# Altium PCB Smart_lockV1.1.PcbDoc (part 2 of 2)
Units mil, origin at the board's own origin, x right, y up, seen from the top; angles counter-clockwise.
Board outline 1820 x 1755 mil, 4 copper layers (Top Layer, Layer 1, Layer 2, Bottom Layer), stack 62.449 mil thick; 74 components, 60 nets, 291 pads, 502 vias.
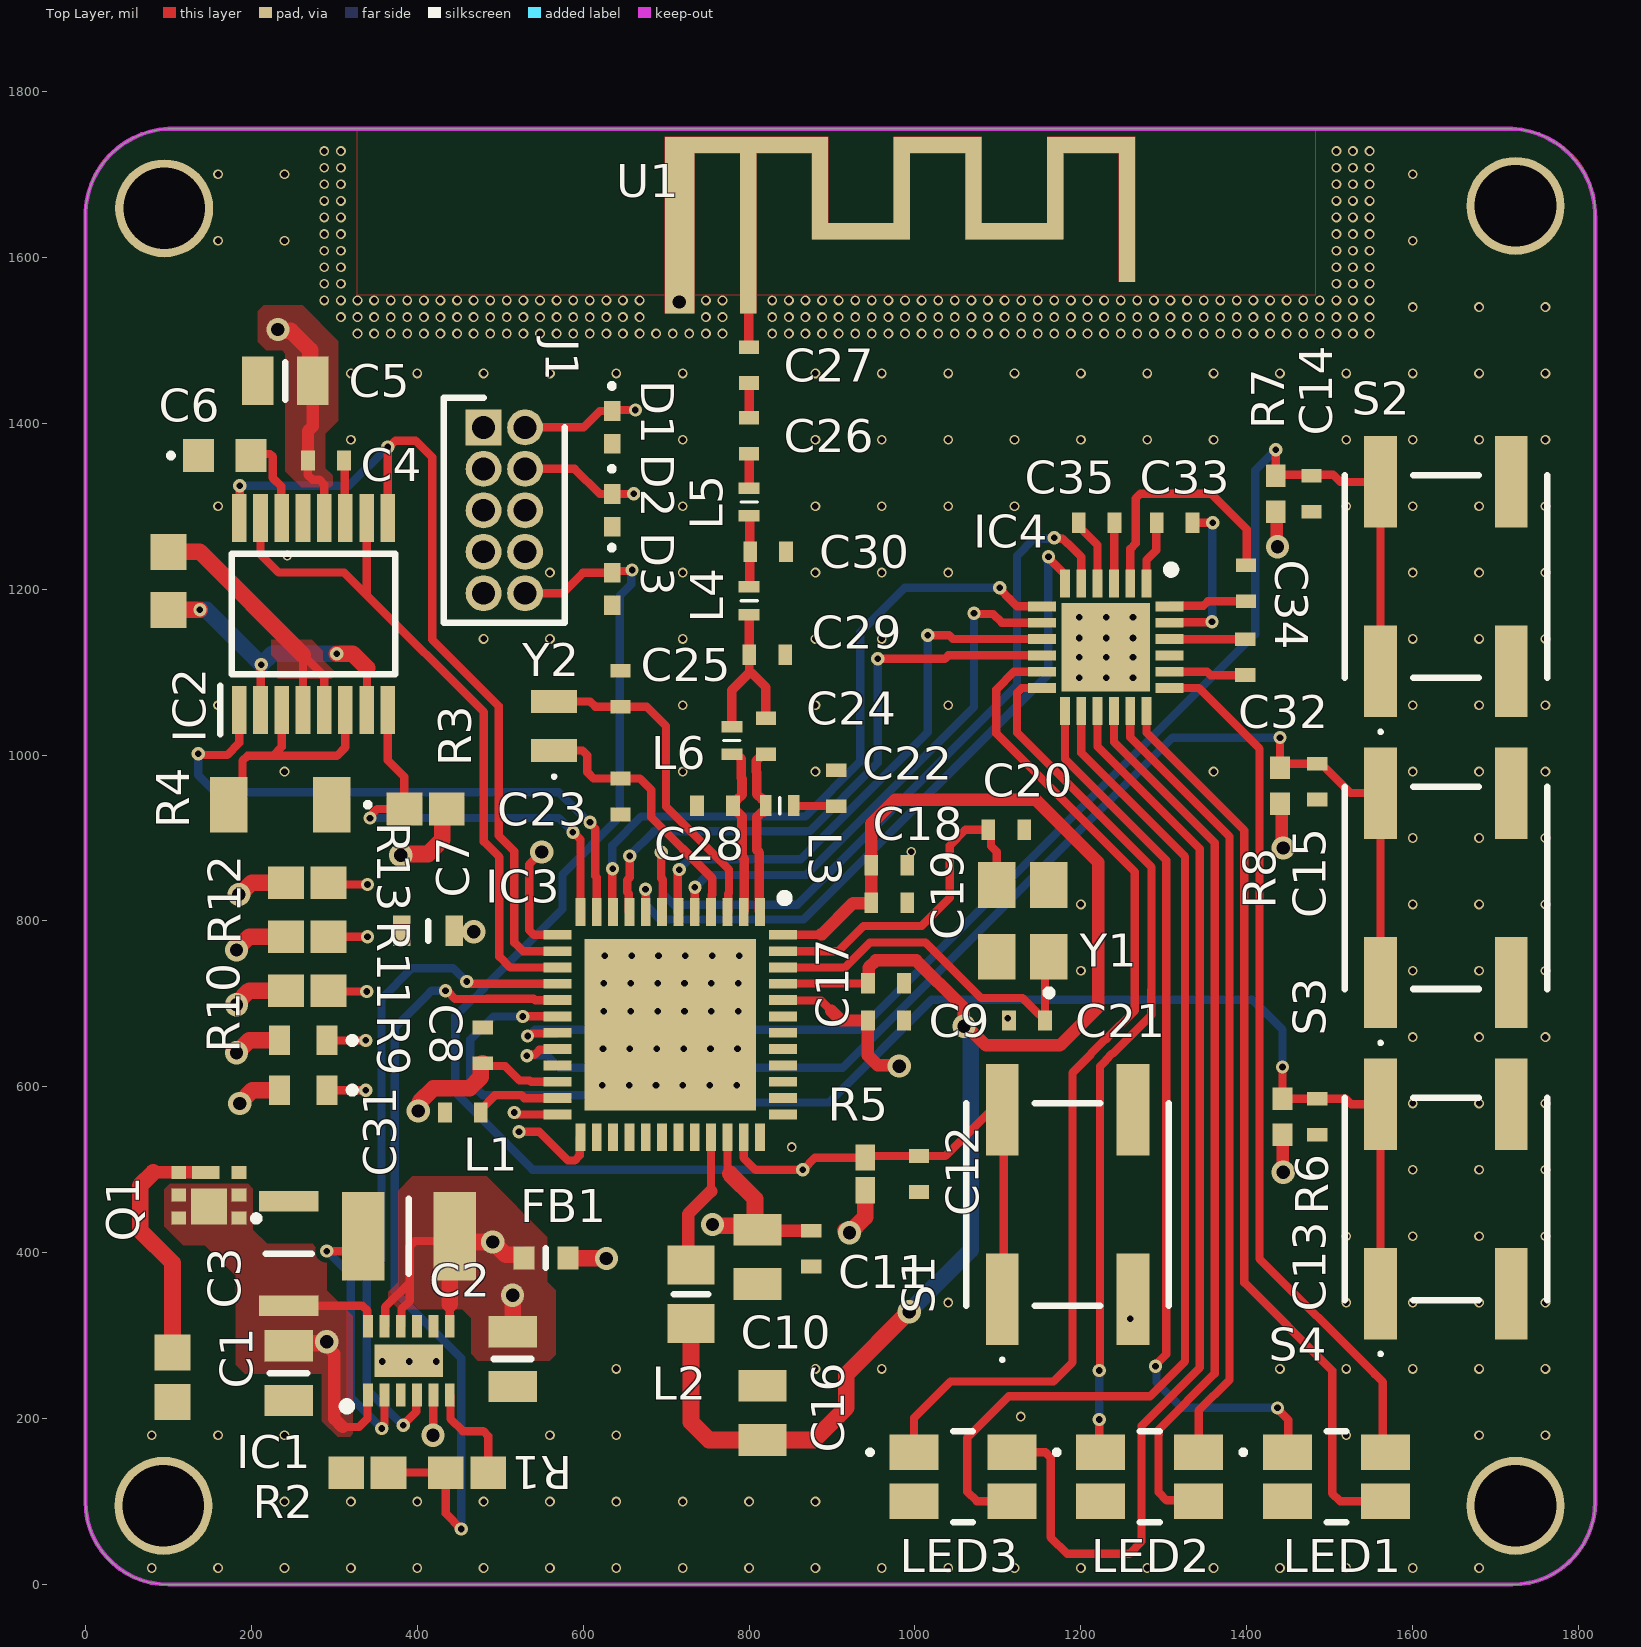
[diagram p0: Top Layer view]

## Via types
v1: diameter 11.81, hole 7.87, Top Layer to Bottom Layer, 383 vias
v2: diameter 16, hole 8, Top Layer to Bottom Layer, tented both sides, 95 vias
v3: diameter 28, hole 16, Top Layer to Bottom Layer, tented both sides, 24 vias

## Nets (pads, with @x,y where several pads share a name; then routed paths per layer and width w, separated by ;. In a path a pad name is that pad's centre, name@x,y a point inside that pad or via, vN(x,y) a via of type N, cw(c..) or ccw(c..) an arc to the next point about the centre after c; other vN are vias at no path point) (continued)
IN1: (continued)
  Top Layer w10: IC2.16 186,1286.24 v2@186,1323 ; IC2.9 364.57,1369.71 373.86,1379 398,1379 418,1359 418,1139.28 498.13,1059.15 498.13,902.96 517.13,883.96 517.13,773.87 527.42,763.58 IC3.14
  Bottom Layer w10: v2(186,1324.62) 317.86,1324.62 v2(364.57,1371.33)
IN2: IC2.10 IC2.15 IC3.15 | length 862.5
  Top Layer w10: IC2.15 211.02,1241.98 233,1220 312,1220 338.98,1193.02 ; IC2.10 338.98,1193.02 ; IC3.15 512.1,743.9 499,757 499,876.81 480.25,895.56 480.25,1051.75 338.98,1193.02
INT: IC3.10 IC4.7 R13.1 | length 1191.9
  Top Layer w10: R13.1 295.18,844 v2(340,844) ; v2(635.48,862.82) 635.2,862.54 635.2,811.73 IC3.10 ; v2(1102.24,1201.76) 1102.24,1200.14 1114.13,1188.25 1114.13,1188.19 1123.11,1179.21 IC4.7
  Layer 2 w10: v2(340,844) 465.14,844 479.14,830 602.66,830 v2(635.48,862.82)
  Bottom Layer w10: v2(635.48,862.82) 635.18,863.12 635.18,891.18 669.88,925.88 867.88,925.88 934,992 934,1148 987.76,1201.76 v2(1102.24,1201.76)
JTAG_TCK: D2.1 IC3.25 J1.4 | length 1550.2
  Top Layer w10: v2(522.67,545.85) 547.15,545.85 581.68,511.32 589.97,511.32 595.83,517.17 595.83,538.27 IC3.25 ; J1.4 589.84,1345 620.16,1314.68 D2.1 660.68,1314.68 v2(661,1315)
  Layer 2 w10: v2(522.67,545.85) 521.53,544.7 500.2,544.7 494.67,539.17 478.83,539.17 472,546 472,570 492,590 546,590 577,559 814,559 852,597 852,773 680,945 680,1296 v2(661,1315)
JTAG_TMS: D1.1 IC3.24 J1.2 | length 1491.6
  Top Layer w10: v2(516.9,569.01) 518.53,569.01 520.81,566.73 IC3.24 ; J1.2 600.47,1395 620.16,1414.68 D1.1 636.32,1416 v2(663,1416)
  Layer 2 w10: v2(516.9,569.01) 541.71,569.01 569.6,541.13 821.4,541.13 869.87,589.6 869.87,780.4 697.87,952.4 697.87,1381.13 v2(663,1416)
LP_D1: IC4.19 LED1.2 | length 1049.8
  Top Layer w10: IC4.19 1342.21,1080.79 1415.32,1007.69 1415.32,916.07 1415.37,916.02 1415.37,392.63 1554.28,253.72 1564.06,243.94 1564.06,162.53 LED1.2
LP_D2: IC4.18 LED1.3 | length 1103.9
  Top Layer w10: IC4.18 1279.21,1026.9 1397,909.11 1397,364 1503,258 1503,110 1512.53,100.47 LED1.3
LP_D3: IC4.17 LED2.2 | length 958.6
  Top Layer w10: IC4.17 1259.53,1021.31 1379.13,901.71 1379.13,246.72 1342.06,209.65 LED2.2
LP_D4: IC4.16 LED2.3 | length 1073.1
  Top Layer w10: IC4.16 1239.84,1015.71 1361.25,894.3 1361.25,254.25 1294,187 1294,181 1293.65,180.65 1293.65,111.35 1303.39,101.61 1340.91,101.61 LED2.3
LP_D5: IC4.15 LED3.2 | length 1350.8
  Top Layer w10: LED3.2 1157.47,159.53 1163.67,153.33 1163.67,57.05 1183.6,37.13 1258.4,37.13 1273.13,51.85 1273.13,191.4 1343.38,261.66 1343.38,886.9 1220.16,1010.12 IC4.15
LP_D6: IC4.14 LED3.3 | length 1260.4
  Top Layer w10: LED3.3 1074.53,100.47 1063,112 1063,177 1113,227 1283.44,227 1325.5,269.06 1325.5,877.44 1200.47,1002.47 IC4.14
LP_D7: IC4.13 LED1.1 | length 1084
  Top Layer w10: IC4.13 1180.79,995.21 1303,873 1303,277.7 1289.96,264.66 v2(1289.96,263.04) ; v2(1437,213) 1437,211.38 1450,198.38 1450,160.58 LED1.1
  Bottom Layer w10: v2(1289.96,263.04) 1291.11,261.89 1291.11,243.65 1321.76,213 v2(1437,213)
LP_D8: IC4.12 LED2.1 | length 1042.6
  Top Layer w10: IC4.12 1128.86,1080.79 1123,1074.93 1123,1027 1285.13,864.87 1285.13,717.13 1285,717 1285,686.72 1238.44,640.17 1237.72,640.17 1230.18,632.62 1230.18,631.9 1223,624.72 1223,259 v2(1222,258) ; v2(1222,199) 1222,161.47 LED2.1
  Bottom Layer w10: v2(1222,199) v2(1222,258)
LP_D9: IC4.11 LED3.1 | length 1236
  Top Layer w10: LED3.1 998.94,200.94 1042.87,244.87 1166.87,244.87 1190,268 1190,617 1212.31,639.31 1212.31,640.03 1230.32,658.04 1231.04,658.04 1265,692 1265,859 1098,1026 1098,1079 1119.47,1100.47 IC4.11
NetC4_1: C4.1 IC2.11 | length 70
  Top Layer w10: C4.1 312.52,1354.13 312.52,1286.54 IC2.11
NetC6_2: C6.2 IC2.14 | length 107
  Top Layer w10: C6.2 201.5,1363 222.5,1363 225.83,1359.67 225.83,1334.17 236.15,1323.85 236.15,1286.13 IC2.14
NetC20_2: C20.2 IC3.47 Y1.3 | length 416
  Top Layer w10: IC3.47 907.58,763.58 938,794 1008,794 1042,828 1042,891 1061,910 C20.2 1091.61,906.73 1091.61,890.39 1098.5,883.5 Y1.3
NetC21_2: C21.2 IC3.46 Y1.1 | length 444.3
  Top Layer w10: IC3.46 915.41,743.9 945.51,774 1012.79,774 1079.79,707 1129.65,707 1149.45,687.2 1153.39,687.2 C21.2@1156.65,683.94 ; C21.2 C21.2@1156.65,683.94 ; Y1.1 1156.65,751.85 C21.2@1156.65,683.94
NetC22_1: C22.1 L3.2 | length 51.5
  Top Layer w10: L3.2 854.06,938.67 904.67,938.67 C22.1
NetC23_2: C23.2 IC3.4 Y2.1 | length 326.8
  Top Layer w10: Y2.1 599.14,1005.47 605,999.61 605,979.25 612.6,971.65 C23.2 668.35,971.65 682.13,957.87 682.13,924.97 755.63,851.46 755.63,831.89 755.12,831.38 755.12,811.73 IC3.4
NetC24_2: C24.2 C29.2 L4.1 L6.1 | length 208.6
  Top Layer w10: L4.1 L4.1@800.17,1169.09 ; C29.2@800.17,1121.17 C29.2 800.35,1099.35 802.65,1099.35
  Top Layer w11.55: L6.1 779.28,1078.28 800.35,1099.35 ; C29.2@800.17,1121.17 L4.1@800.17,1169.09 ; 802.65,1099.35 820.28,1081.72 C24.2
NetC25_2: C25.2 IC3.3 Y2.2 | length 403.5
  Top Layer w10: Y2.2 608.47,1064.53 614.65,1058.35 C25.2 676.65,1058.35 700,1035 700,937.67 775.71,861.96 775.71,833.8 774.8,832.89 774.8,828.71 774.8,811.73 IC3.3
NetC26_1: C26.1 L5.2 | length 41.6
  Top Layer w11.55: L5.2 C26.1
NetC26_2: C26.2 C27.1 | length 41.7
  Top Layer w11.55: C26.2 C27.1
NetC27_2: C27.2 U1.1 | length 137.8
  Top Layer w11.55: U1.1@799,1629 799.5,1628.5 799.5,1492.15 C27.2
NetC30_2: C30.2 L4.2 L5.1 | length 86.7
  Top Layer w10: L4.2 L4.2@800.67,1203.41 ; L5.1 L5.1@800.67,1287.59 ; C30.2@800.67,1244.33 C30.2 C30.2@800.67,1245.67
  Top Layer w11.55: L4.2@800.67,1203.41 C30.2@800.67,1244.33 ; C30.2@800.67,1245.67 L5.1@800.67,1287.59
NetC31_2: C31.2 IC3.23 | length 104.9
  Top Layer w10: C31.2 476.65,572.94 493.6,589.89 525.55,589.89 529.02,586.42 IC3.23
NetC32_1: C32.1 IC4.22 | length 91.3
  Top Layer w10: IC4.22 1306.87,1139.75 1397.91,1139.75 C32.1
NetC33_1: C33.1 IC4.1 | length 78.3
  Top Layer w10: IC4.1 1279.21,1235.21 1291,1247 1291,1279.65 C33.1
NetC33_2: C33.2 IC4.23 | length 195.8
  Top Layer w10: IC4.23 1307.37,1160.12 1357.41,1160.12 v2(1358,1160.72) ; C33.2 v2(1359,1280)
  Bottom Layer w10: v2(1358,1160.72) 1358.5,1161.22 1358.5,1279.5 v2(1359,1280)
NetC34_1: C34.1 IC4.24 | length 94.8
  Top Layer w10: IC4.24 1307.68,1180.12 1347.88,1180.12 1353.11,1185.35 C34.1
NetC34_2: C34.2 IC4.2 | length 305.9
  Top Layer w10: IC4.2 1259.53,1248.53 1266,1255 1266,1309.14 1271.86,1315 1357,1315 1400,1272 C34.2@1400,1225.39
NetIC1_2: IC1.2 L1.1 | length 334.6
  Top Layer w10: v2(291,402) 316.88,402 L1.1 ; v2(357.38,188.1) 357.38,189.72 360.47,192.81 IC1.2
  Bottom Layer w10: v2(291,402) 320,373 320,225.48 v2(357.38,188.1)
NetIC1_6: IC1.6 R1.1 | length 127.4
  Top Layer w10: IC1.6 440.12,227.76 440.12,199.88 455,185 479.73,185 485.59,179.14 R1.1
NetIC2_3: IC2.3 IC2.6 R4.2 | length 295.3
  Top Layer w10: R4.2 189.42,956.43 189.42,993.14 195.28,999 226,999 ; IC2.3 236.61,1009.61 226,999 ; IC2.6 313.39,1009.39 303,999 226,999
nFault: IC2.8 IC3.12 R3.1 | length 524.9
  Top Layer w10: v2(343,924) 344.15,925.15 344.15,927.52 351.63,935 R3.1 384.41,973.72 364.57,993.57 IC2.8 ; v2@589,905.87 596.73,898.14 IC3.12
  Bottom Layer w10: v2(343,924) 570.67,924 v2(587.67,907)
nReset: C12.2 D3.1 IC3.35 J1.10 R5.1 S1.1 S1.4 | length 1937.5
  Top Layer w10: J1.10 575,1195 599.68,1219.68 D3.1 637.17,1221.85 657.85,1221.85 v2(659,1223) ; IC3.35 793.58,514.42 808,500 864.75,500 879.44,514.68 R5.1 941.97,516.65 C12.2 1036.65,516.65 1094.17,574.17 1107,574.17 S1.1@1107,328.37
  Bottom Layer w10: v2(659,1223) 657.85,1221.85 657.85,1205.54 644,1191.68 644,925.28 575,856.28 575,814.48 480.51,719.99 480.51,718.34 468.28,706.11 466.63,706.11 446,685.48 446,593 538.81,500.19 v2(864.56,500.19)
nSleep: IC2.1 IC3.11 | length 728.4
  Top Layer w10: v2@136,1000 171,1000 185.43,1014.43 IC2.1 ; v2(608.27,919.07) 608.27,917.45 614.61,911.11 614.61,854.18 616.42,852.37 IC3.11
  Bottom Layer w10: v2(136,1001.62) 136,976 157,955 570.72,955 606.65,919.07 v2(608.27,919.07)
nUSR_BTN1: C13.2 IC3.18 R6.1 S4.1 S4.4 | length 1656.5
  Top Layer w10: v2(527.15,684.84) 527.3,684.98 569.03,684.98 IC3.18 ; v2(1443,624) R6.1 C13.2 1519.35,585.65 1525.83,579.17 S4.4 S4.1
  Bottom Layer w10: v2(527.15,684.84) 491.84,684.84 464,657 464,605 479.11,589.89 605.72,589.89 614.35,581.25 896.25,581.25 1020,705 1407,705 1443,669 v2(1443,624)
nUSR_BTN2: C14.2 IC3.19 R7.1 S2.1 S2.4 | length 1738.3
  Top Layer w10: v2(533.04,661.29) 534.66,661.29 537.62,664.25 568.27,664.25 IC3.19 ; v2(1435,1368) R7.1 1436.35,1338 1504,1338 1512.83,1329.17 S2.4 S2.1
  Bottom Layer w10: v2(533.04,661.29) 534.19,661.29 541.9,669 933.44,669 1410.13,1145.68 1410.13,1343.13 v2(1435,1368)
nUSR_BTN3: C15.2 IC3.20 R8.1 S3.1 S3.4 | length 1508.3
  Top Layer w10: v2(532.22,637.43) 533.37,638.58 541.12,638.58 547.11,644.57 568.27,644.57 IC3.20 ; R8.1 1445,989.65 C15.2 ; R8.1@1440,989.65 v2(1440,1021) ; C15.2@1492.35,986.65 1524.83,954.17 S3.4 S3.1
  Bottom Layer w10: v2(532.22,637.43) 532.56,637.77 556.47,637.77 571.24,623 912.72,623 1310.72,1021 v2(1440,1021)
OUT1: IC2.2 IC2.7 pad.4 | length 385.1
  Top Layer w10: IC2.2 211.51,1054.82 211.51,1108.51 v2(212,1109) ; IC2.7 339.49,1054.84 339.49,1104.89
  Top Layer w20: pad.4 v2(138,1175) ; v2(303,1122) 322.38,1122 339.49,1104.89
  Bottom Layer w20: v2(138,1175) 146,1175 v2(212,1109) 225,1122 v2(303,1122)
OUT2: IC2.4 IC2.5 pad.5 | length 357.2
  Top Layer w10: IC2.4 262.2,1120.8 287.8,1095.2 IC2.5
  Top Layer w20: pad.5 138,1245 262.2,1120.8
RF_n: C28.2 IC3.2 L6.2 | length 211.1
  Top Layer w11.55: L6.2 785.19,1000.83 790.78,995.24 790.78,972.31 791.51,971.59 791.51,952.06 785.65,946.2 783.92,946.2 780.65,942.94 780.65,935.06 783.92,931.8 785.6,931.8 791.46,925.94 791.46,877.94 794.43,874.98 794.43,811.67 IC3.2
RF_p: C24.1 IC3.1 L3.1 | length 211.5
  Top Layer w11.55: IC3.1 812.43,811.67 812.43,882.43 809.46,885.4 809.46,925.35 815.32,931.2 818.38,931.2 820.27,933.09 820.27,944.91 818.38,946.8 815.37,946.8 809.51,952.65 809.51,979.04 808.78,979.77 808.78,993.35 816.34,1000.91 C24.1
SCL: IC3.6 IC4.9 R10.1 | length 1188
  Top Layer w10: R10.1 v2(338,656) ; IC3.6 713.94,811.73 713.94,832.89 713.88,832.95 713.88,858.44 715.69,860.25 v2(715.69,861.88) ; v2(1015.48,1144.52) 1041,1144.52 1045.6,1139.92 1153.15,1139.92 IC4.9
  Layer 2 w10: v2(338,656) 339,655 437,655 506,724 531.03,724 668.91,861.88 v2(715.69,861.88)
  Bottom Layer w10: v2(715.69,861.88) 728.22,874.4 862.4,874.4 1015.48,1027.48 v2(1015.48,1144.52)
SDA: IC3.5 IC4.8 R9.1 | length 1200.7
  Top Layer w10: R9.1 v2(338,596) ; IC3.5 734.64,810.94 734.64,840.42 v2(734.75,840.54) ; v2(1071.24,1170.76) 1072,1170 1094.24,1170 1104.71,1159.53 IC4.8
  Layer 2 w10: v2(338,596) 368,626 433.28,626 513.28,706 542,706 652,816 709.4,816 733.94,840.54 v2(734.75,840.54)
  Bottom Layer w10: v2(734.75,840.54) 749.61,855.39 868.67,855.39 1071.24,1057.96 v2(1071.24,1170.76)
TRIG: IC3.9 IC4.10 R12.1 | length 1433.8
  Top Layer w10: R12.1 v2(340.05,781) ; IC3.9 654.88,811.73 654.88,832.89 653.07,834.7 653.07,849.18 656.35,852.47 656.35,878.03 v2(656.06,878.32) ; v2(955,1116) 1036.03,1116 1040.19,1120.16 IC4.10
  Layer 2 w10: v2(340.05,781) 339.05,780 264,780 250,794 250,865 328,943 613.86,943 655.54,901.32 655.54,878.85 v2(656.06,878.32)
  Bottom Layer w10: v2(656.06,878.32) 656.06,878.81 685.26,908.01 872.63,908.01 955,990.37 v2(955,1116)
VBATT: pad.3 Q1.4 Q1.7 | length 302.8
  Top Layer w15: 82,497 Q1.4 Q1.7
  Top Layer w20: 82,497 66,481 66,427 105,388 pad.3
VDD_LED: C35.2 IC4.3 | length 73.6
  Top Layer w10: IC4.3 1240.25,1207.18 1240.25,1279.59 C35.2
VDDR: C16.2 C17.2 C18.2 C19.2 IC3.45 IC3.48 L2.2 | length 2039.4
  Top Layer w10: IC3.48 886.58,783.27 887.27,783.96 ; IC3.45@841.22,724.61 C17.2@942.95,724.61
  Top Layer w15: 887.27,783.96 887.96,783.96 925.53,821.53 946.83,821.53 C18.2 C19.2 947.35,917.35 976,946 1145.65,946 1221,870.65 1221,696.35 1174.57,649.92 1085.6,649.92 v3@1061.5,674.02 ; C17.2@942.95,724.61 C17.2 944.11,725.77 944.11,743.79 952.9,752.58 1001.42,752.58 1055.42,698.58 1059,695 v3(1059,673)
  Top Layer w20: L2.2 730,196 751.68,174.32 C16.2 878.32,174.32 917,213 917,253 v3(993,329)
  Bottom Layer w20: v3(993,329) 1067,403 1067,662.84 1059,670.84 v3(1059,673)
VDDS: C7.2 C8.2 C9.2 C10.2 C11.2 FB1.2 IC3.13 IC3.22 IC3.34 IC3.44 J1.1 R5.2 R6.2 R7.2 R8.2 R9.2 R10.2 R11.2 R12.2 R13.2 | length 5049
  Top Layer w10: C8.2@481.27,625.08 506.02,625.08 523.34,607.76 535.78,607.76 537.44,606.1 IC3.22 ; v3(550,883) 535,868 535,789.13 540.86,783.27 IC3.13 ; IC3.34 773.9,498.29 777.09,495.1 ; IC3.44 841.35,704 887,704 899,692
  Top Layer w15: C10.2@811.02,426.65 C11.2 ; 899,692 911,680 C9.2 943.35,637.8 955.06,626.08 v3@979.92,626.08 ; R7.2@1435.67,1294.02 1436,1293.69 1436,1252 v3(1437,1251) ; R8.2@1440.67,942.02 1442,940.69 1442,890 v3(1444,888) ; R6.2@1443.67,543.02 1443.5,542.85 1443.5,497.5 v3(1444,497)
  Top Layer w20: v3(182,641) 182.41,641 197.41,656 R10.2 ; v3(182,699) 182,700.59 197.41,716 R11.2 ; v3(182,765) 182,765.59 197.41,781 R12.2 ; v3(185,832) 186.41,832 200.41,846 R13.2 ; v3(186,580) 186,580.59 201.41,596 R9.2 ; v3(401.33,571) 402.86,572.53 402.86,581.61 419.58,598.33 463.35,598.33 476.8,611.78 476.8,626.61 478.53,628.35 C8.2 ; FB1.2@582.06,393.33 v3@627.67,393.33 ; v3(756,434) 757.53,432.47 805.21,432.47 C10.2@807.13,430.54 ; 777.09,495.1 807.13,465.06 C10.2@807.13,430.54 ; C10.2 C10.2@807.13,430.54 ; v3@916.18,426.65 918.84,424 v3(921,424) 940,443 R5.2 ; v3@979.92,626.08 v3(981,625)
  Layer 1 w15: J1.1 469.44,1384.44 445.44,1384.44 385,1324 385,1048 v3(550,883)
  Layer 1 w30: v3(185,832) 182,829 v3(182,765) 182,584 236,530 412.72,530 ; v3@401,571 401,736.63 451.37,787 v3(468.13,787) ; v3(401.33,571) 412.72,559.61 412.72,530 ; v3(628,393) 622,393 485,530 412.72,530 ; v3@630,395 717,395 v3(756,434) 788,402 899,402 v3(921,424) ; v3@922,425 1008,425 ; v3(981,625) 1038,568 1038,455 1008,425 ; v3(1437,1251) 1510,1178 1510,954 v3(1444,888) 1505,827 1505,558 1372,425 1008,425
  Bottom Layer w15: v3(468.13,787) v3@471,787 ; v3@547.51,880.51 v3(550,883)
pads on no net: IC3.21 IC3.26 IC3.27 IC3.28 IC3.29 IC3.30 IC3.31 IC3.32 IC3.36 IC3.37 IC3.38 IC3.39 IC3.40 IC3.41 IC3.42 IC3.43 J1.6 J1.7 J1.8 LED3.4

## Polygon pours and split planes (outlines as drawn)
GND on Top Layer "NONET_L01_P004" (solid, remove dead copper, shelved, pour order 4): 327.18,1754.96 327.18,1554.83 1483,1554.83 1483,1754.96 1720.21,1754.96 cw(c1720.22,1654.96) 1820.21,1654.96 1820.21,99.96 cw(c1720.22,99.96) 1720.21,-0.04 100.21,-0.04 cw(c100.21,99.96) 0.21,99.96 0.21,1654.96 cw(c100.21,1654.96) 100.21,1754.96
OUT2 on Top Layer "OUT2_L01_P000" (solid, pour order 0): 224,1139 273,1139 286,1126 286,1115 300,1101 300,1092 232,1092 231,1093 231,1113 224,1120
6V on Top Layer "6V_L01_P002" (solid, pour order 2): 95,476.51 101.49,483 196,483 202,477 202,428 219,411 278,411 291,398 291,355 322,324 322,182 319,178 304,178 285,197 285,254 192,254 183,263 181,265 181,372 144,409 118,409 95,432
3V on Top Layer "3V_L01_P003" (solid, pour order 3): 377,365 365,353 365,345 378,332 454,332 465,321 465,278 473,270 560,270 567,277 567,355 557,365 557,419 484,492 394,492 377,475 377,410
6V on Top Layer "6V_L01_P001" (solid, pour order 1): 241,1342 260,1323 296,1323 298,1325 298,1337 289,1346 289,1387 305,1403 305,1499 262,1542 215,1542 208,1535 208,1498 218,1488 237,1488 241,1484
6V on Layer 1 "6V_L02_P029" (solid, pour order 29): 306,360 330,336 330,255 317,242 94,242 6,330 6,1465 105,1564 248,1564 269,1543 269,1474 244,1449 149,1449 92,1392 92,446 178,360 281,360
VDDS on Layer 1 "VDDS_L02_P030" (solid, pour order 30): 156.28,870 147,860.13 147,541 207,481 461,481 562,380 611,331 949,331 999,381 1420,381 1572,533 1572,1226 1492,1306 1401,1306 1384,1289 1384,597 1335,548 1130,548 1008,670 920,670 893,643 893,547 924,516 924,477 919,472 643,472 601,514 531,514 461,584 461,690 582,811 582,888 567.58,902.42 567.58,969.42 556.5,981.5 446.5,1091.5 447,1352 475.85,1380.85 496.15,1380.85 503,1374 503,1435 405,1435 386,1416 386,1366 331,1311 331,997 409,919 409,849 346,786 346,607 314,575 225,575 206,594 206,848 184,870
GND on Layer 1 "NONET_L02_P032" (solid, shelved, pour order 32): 326,1755 326,1555 1483,1555 1483,1755 1720,1755 cw(c1720,1655) 1820,1655 1820,100 cw(c1720,100) 1720,0 100,0 cw(c100,100) 0,100 0,1655 cw(c100,1655) 100,1755
GND on Bottom Layer "NONET_L04_P009" (solid, remove dead copper, shelved, pour order 9): 327,1755 327,1555 1483,1555 1483,1755 1720,1755 cw(c1720,1655) 1820,1655 1820,100 cw(c1720,100) 1720,0 100,0 cw(c100,100) 0,100 0,1655 cw(c100,1655) 100,1755
GND on Layer 2 "NONET_L03_P010" (solid, shelved, pour order 10): 327,1755 327,1555 1483,1555 1483,1755 1720,1755 cw(c1720,1655) 1820,1655 1820,100 cw(c1720,100) 1720,0 100,0 cw(c100,100) 0,100 0,1655 cw(c100,1655) 100,1755

## Keep-outs
Keep-Out Layer:
  the board outline again, w5